# Altium PCB F103RCT6验证板_2022-02-19.pcbdoc (part 2 of 2)
Units mm, origin at the board's own origin, x right, y up, seen from the top; angles counter-clockwise.
Board outline 119 x 89.53 mm, 2 copper layers (Top Layer, Bottom Layer); 128 components, 123 nets, 496 pads, 479 vias.
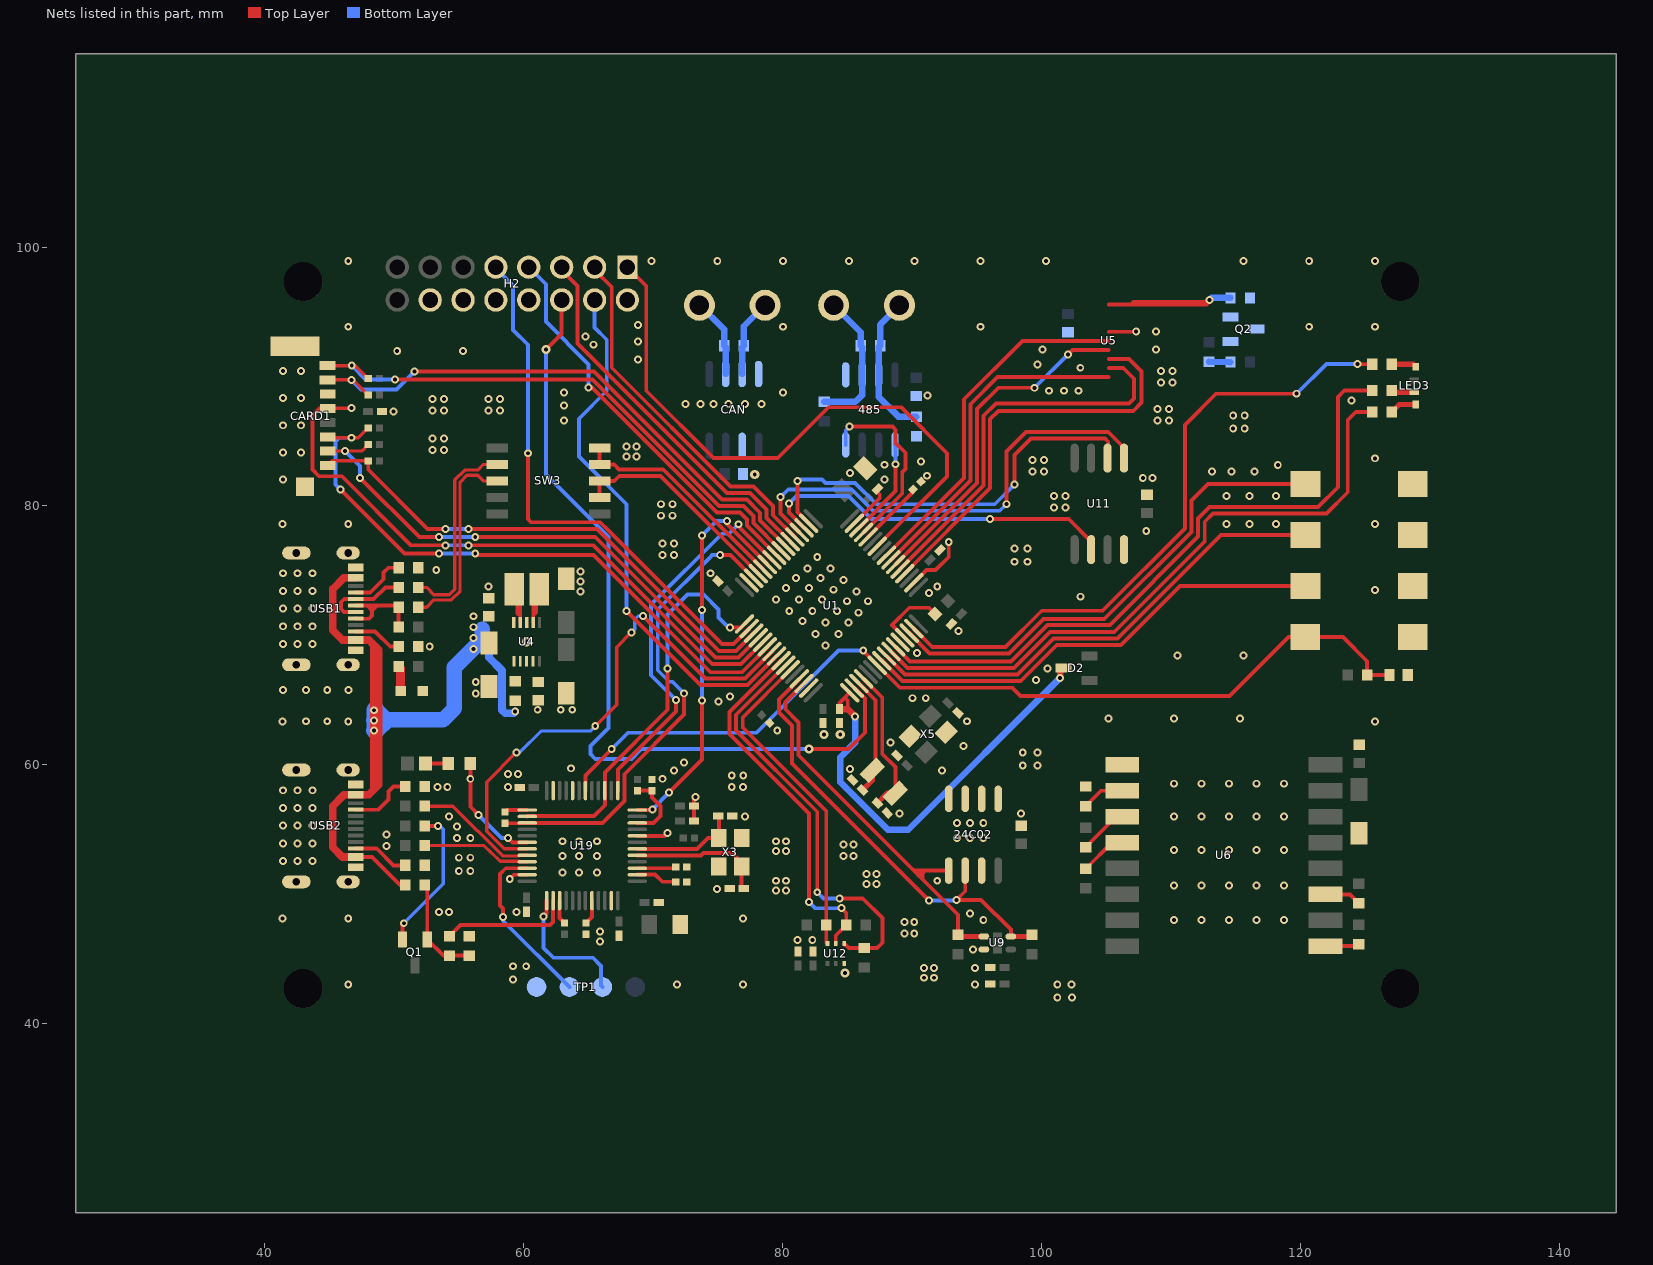
[diagram p2: the nets of this part, all layers, seen from the top]

## Via types
v1: diameter 0.61, hole 0.305, Top Layer to Bottom Layer, tented both sides, 454 vias
v2: diameter 0.7, hole 0.305, Top Layer to Bottom Layer, tented both sides, 25 vias

## Nets (pads, with @x,y where several pads share a name; then routed paths per layer and width w, separated by ;. In a path a pad name is that pad's centre, name@x,y a point inside that pad or via, vN(x,y) a via of type N, cw(c..) or ccw(c..) an arc to the next point about the centre after c; other vN are vias at no path point) (continued)
GND: 24C02.1 24C02.2 24C02.3 24C02.4 24C02.7 485.5 C1.1 C2.2 C3.1 C4.2 C5.1 C6.2 C7.1 C8.1 C9.1 C10.1 C11.2 C12.1 C13.1 C14.2 C15.1 C16.1 C17.1 C18.1 C19.1 C20.1 C21.1 C22.1 C23.2 C24.2 C25.2 C27.1 C29.2 C31.1 C32.1 C33.1 C34.2 C35.1 C36.1 C37.1 C38.2 C39.1 C40.1 C45.2 CAN.2 CAN.8 CARD1.6 CARD1.9 CARD1.10 H2.2 H2.8 H2.10 H2.12 H2.14 KEY1.B KEY2.B KEY3.B LED4.2 Q2.2 R1.2 R6.2 R9.2 R12.2 R15.2 R24.2 R28.1 R29.2 R32.2 R33.2 R39.1 R44.2 R57.2 RST.B TP1.4 U1.12 U1.18 U1.31 U1.47 U1.63 U3.2 U4.3 U4.9 U4.11 U5.8 U5.13 U6.9 U9.4 U11.4 U12.3 U19.8 U19.20 U19.23 U19.35 U19.47 USB1.1 USB1.12 USB1.13 USB1.14 USB1.15 USB1.16 USB2.1 USB2.12 USB2.13 USB2.14 USB2.15 USB2.16 X3.2 X3.4 X5.2 X5.4 | length 16.5
  Top Layer w0.3: 59.182,51.435 v1(58.928,51.181) 59.264,51.517 U19.35@60.277,51.517 ; U19.8@68.777,54.517 70.9,54.517 v1(71.12,54.737) ; C27.1@73.158,55.677 73.158,56.82 73.158,57.41 v1(73.279,57.531) ; U1.31@85.547,78.664 87.503,80.62 87.503,80.899 87.323,81.079 C22.1@87.323,81.302 ; U1.18@90.143,74.068 91.132,75.057 91.821,75.057 92.837,76.073 v1(92.837,77.216) ; U5.8@105.191,93.457 v1(107.315,93.472)
  other v1: 101.219,42.037 102.362,42.037 46.452,43.043 71.852,43.043 76.932,43.043 94.869,43.053 101.219,43.053 102.332,43.043 59.182,43.434 90.932,43.561 91.694,43.561 90.932,44.323 91.694,44.323 94.869,44.323 59.182,44.45 60.198,44.45 94.701,45.757 65.913,46.355 81.153,46.482 82.296,46.482 89.408,46.99 90.17,46.99 65.913,47.117 89.408,47.879 90.17,47.879 95.504,48.006 110.236,48.006 112.363,48.006 114.49,48.006 116.618,48.006 118.745,48.006 41.372,48.123 46.452,48.123 76.932,48.123 94.488,48.514 53.467,48.641 54.229,48.641 59.436,48.641 79.502,50.292 80.264,50.292 74.93,50.419 110.236,50.673 112.363,50.673 114.49,50.673 116.618,50.673 118.745,50.673 86.487,50.8 87.249,50.8 79.502,51.054 80.264,51.054 91.948,51.054 86.487,51.562 87.249,51.562 62.992,51.689 64.262,51.689 65.659,51.689 54.991,51.816 55.88,51.816 41.402,52.578 42.545,52.578 43.688,52.578 54.991,52.832 55.88,52.832 62.992,52.959 64.262,52.959 65.659,52.959 84.709,52.959 85.471,52.959 79.502,53.34 80.264,53.34 110.236,53.423 112.363,53.423 114.49,53.423 116.618,53.423 118.745,53.423 49.403,53.721 84.709,53.848 85.471,53.848 41.402,53.943 42.545,53.943 43.688,53.943 62.992,54.102 64.262,54.102 65.659,54.102 79.502,54.102 80.264,54.102 54.864,54.356 55.88,54.356 93.472,54.356 94.488,54.356 95.504,54.356 49.403,54.61 54.864,55.245 41.402,55.308 42.545,55.308 43.688,55.308 93.472,55.499 94.488,55.499 95.504,55.499 54.229,56.007 77.089,56.007 110.236,56.007 112.363,56.007 114.49,56.007 116.618,56.007 118.745,56.007 89.027,56.261 98.425,56.261 41.402,56.674 42.545,56.674 43.688,56.674 41.402,58.039 42.545,58.039 43.688,58.039 53.34,58.293 54.102,58.293 58.801,58.293 76.073,58.293 76.932,58.283 110.236,58.547 112.363,58.547 114.49,58.547 116.618,58.547 118.745,58.547 70.739,58.928 76.073,59.182 76.962,59.182 58.801,59.309 59.563,59.309 71.628,59.563 92.329,59.563 85.217,59.69 63.665,59.738 98.552,59.944 99.695,59.944 72.39,60.198 98.552,60.96 99.695,60.96 93.98,61.468 88.335,61.74 79.588,62.648 41.372,63.363 43.18,63.373 44.831,63.373 46.452,63.363 94.234,63.373 125.758,63.363 105.169,63.583 110.249,63.583 115.329,63.583 61.087,64.262 62.865,64.262 63.754,64.262 75.057,64.897 90.043,65.151 91.059,65.151 75.946,65.278 56.302,65.513 41.402,65.786 43.18,65.786 44.831,65.786 46.482,65.786 56.302,66.402 99.568,66.548 100.457,67.437 110.518,68.443 115.598,68.443 90.394,68.631 52.746,69.134 83.312,69.215 41.402,69.342 42.545,69.342 43.688,69.342 82.55,70.104 84.328,70.104 93.599,70.358 41.402,70.707 42.545,70.707 43.688,70.707 83.312,70.993 85.09,70.993 81.534,71.12 85.852,71.755 80.518,71.882 82.296,71.882 84.201,71.882 41.402,72.072 42.545,72.072 43.688,72.072 84.963,72.644 86.614,72.644 79.502,72.771 81.28,72.771 83.058,72.771 103.011,72.992 91.313,73.279 64.39,73.405 85.725,73.406 41.402,73.438 42.545,73.438 43.688,73.438 83.947,73.533 125.758,73.523 80.264,73.66 82.042,73.66 57.277,73.787 91.948,73.787 64.39,74.167 84.709,74.295 81.026,74.422 82.931,74.422 41.402,74.803 42.545,74.803 43.688,74.803 74.422,74.803 64.39,74.929 53.248,75.042 81.915,75.184 83.693,75.184 97.917,75.692 98.933,75.692 82.677,76.073 70.739,76.2 71.628,76.2 97.917,76.708 98.933,76.708 70.739,77.089 71.628,77.089 108.091,78.072 41.372,78.603 46.452,78.603 114.3,78.613 116.078,78.613 118.11,78.613 125.758,78.603 70.612,79.248 71.501,79.248 100.965,79.883 101.854,79.883 70.612,80.137 71.501,80.137 100.965,80.772 101.854,80.772 114.3,80.772 116.078,80.772 118.11,80.772 41.402,82.042 87.884,82.042 107.823,82.169 108.585,82.169 91.145,82.333 85.217,82.55 99.314,82.677 100.203,82.677 113.157,82.677 114.681,82.677 116.459,82.677 118.251,83.152 87.884,83.185 90.684,83.426 99.314,83.566 100.203,83.566 125.758,83.683 67.945,83.82 68.707,83.82 41.402,84.138 42.799,84.138 52.959,84.328 53.848,84.328 67.945,84.582 68.707,84.582 52.959,85.217 53.848,85.217 114.808,85.979 115.697,85.979 41.402,86.233 42.799,86.233 63.119,86.614 108.966,86.614 109.855,86.614 114.808,86.995 115.697,86.995 49.952,87.295 52.959,87.376 53.848,87.376 57.277,87.376 58.166,87.376 108.966,87.503 109.855,87.503 63.119,87.757 72.517,87.884 73.66,87.884 74.676,87.884 75.819,87.884 77.089,87.884 78.359,87.884 123.952,88.138 52.959,88.265 53.848,88.265 57.277,88.265 58.166,88.265 41.402,88.328 42.799,88.328 91.186,88.519 63.119,88.773 80.038,88.763 100.584,88.9 101.727,88.9 102.87,88.9 109.22,89.535 110.109,89.535 41.402,90.424 42.799,90.424 109.22,90.424 110.109,90.424 102.997,90.678 99.695,90.932 68.834,91.313 50.234,91.96 55.314,91.96 100.076,92.075 108.839,92.075 65.405,92.456 68.834,92.71 64.77,93.091 108.839,93.472 46.452,93.843 80.038,93.843 95.278,93.843 120.678,93.843 125.758,93.843 68.834,93.98 46.452,98.923 69.878,98.923 74.958,98.923 80.038,98.923 85.118,98.923 90.198,98.923 95.278,98.923 100.358,98.923 115.598,98.923 120.678,98.923 125.758,98.923
  other v2: 84.836,43.942 83.185,62.357 84.455,62.357 60.234,69.515 77.851,82.423
IICSCL: 24C02.6 R48.2 U1.61 U9.2 | length 34.6
  Top Layer w0.3: U1.61@81.304,66.644 79.715,65.055 79.715,64.046 80.731,63.03 80.731,60.111 v1(91.314,49.529) ; 24C02.6@94.108,51.837 94.108,50.244 v1(93.431,49.567) 95.336,49.567 97.63,47.273 U9.2@97.63,46.746
  Top Layer w0.4: U9.2@97.63,46.746 99.131,46.746 R48.2@99.258,46.872
  Bottom Layer w0.3: v1(91.314,49.529) 93.393,49.529 v1(93.431,49.567)
IICSDA: 24C02.5 R46.2 U1.62 U9.3 | length 31.8
  Top Layer w0.3: U1.62@81.658,66.29 80.223,64.855 80.223,64.299 81.239,63.283 81.239,60.743 93.558,48.424 R46.2@93.558,46.891 ; 89.936,52.046 90.145,51.837 24C02.5@92.838,51.837 ; 90.511,51.471 90.552,51.512 90.552,51.837 ; 90.797,51.184 90.797,51.611 91.023,51.837 91.118,51.837
  Top Layer w0.4: R46.2@93.558,46.891 93.704,46.746 U9.3@95.55,46.746
KEY1: KEY1.A U1.14 | length 38.1
  Top Layer w0.3: U1.14@89.789,70.179 91.364,68.605 97.483,68.605 100.15,71.272 104.849,71.272 111.58,78.003 111.58,80.416 112.85,81.686 KEY1.A@120.384,81.686
KEY2: KEY2.A U1.9 | length 37.4
  Top Layer w0.3: U1.9@88.021,68.411 89.454,66.98 98.143,66.98 100.924,69.761 105.877,69.761 113.866,77.749 KEY2.A@120.384,77.749
KEY3: KEY3.A U1.8 | length 36.4
  Top Layer w0.3: U1.8@87.668,68.058 89.253,66.472 98.397,66.472 101.178,69.253 106.131,69.253 110.703,73.812 KEY3.A@120.384,73.812
LCDCS: U1.24 U5.7 | length 27.6
  Top Layer w0.3: U1.24@88.021,76.189 94.003,82.172 94.003,88.24 98.519,92.756 U5.7@105.191,92.757
LCDDC: U1.20 U5.5 | length 32.2
  Top Layer w0.3: U1.20@89.436,74.775 96.035,81.374 96.035,86.716 96.67,87.351 107.084,87.351 107.719,87.986 107.719,90.399 106.761,91.357 U5.5@105.191,91.357
LCDRES: U1.22 U5.6 | length 26.7
  Top Layer w0.3: U1.22@88.729,75.482 95.019,81.773 95.019,87.478 96.67,89.129 v1(99.464,89.129) ; v1(102.051,91.712) 102.396,92.057 U5.6@105.191,92.057
  Bottom Layer w0.3: v1(99.464,89.129) 99.468,89.129 v1(102.051,91.712)
LCDSCL: U1.21 U5.4 | length 32.1
  Top Layer w0.3: U1.21@89.082,75.128 95.527,81.573 95.527,86.97 96.479,87.921 105.225,87.921 ; 103.591,87.921 106.766,87.921 107.147,88.302 107.147,89.826 106.316,90.657 U5.4@105.191,90.657
LCDSDA: U1.23 U5.3 | length 26.1
  Top Layer w0.3: U1.23@88.375,75.836 94.511,81.971 94.511,87.859 96.609,89.957 U5.3@105.191,89.957
LED1: R11.2 U1.15 | length 49.7
  Top Layer w0.3: U1.15@90.143,70.532 91.562,69.113 97.229,69.113 100.023,71.907 104.722,71.907 111.072,78.257 111.072,86.258 113.485,88.671 v1(119.708,88.671) ; v1(124.419,90.969) R11.2@125.555,90.95
  Bottom Layer w0.3: v1(119.708,88.671) 122.005,90.969 v1(124.419,90.969)
LED2: R8.2 U1.11 | length 50.9
  Top Layer w0.3: U1.11@88.73,69.118 89.85,67.996 97.635,67.996 100.457,70.818 105.283,70.818 112.1,77.635 112.1,79.032 112.989,79.921 121.371,79.921 122.895,81.445 122.895,88.43 123.383,88.918 R8.2@125.555,88.918
LED2_1: LED2.1 R23.2 | length 1.8
  Top Layer w0.3: R23.2@52.43,60.117 LED2.1@54.182,60.117
LED3: R2.2 U1.10 | length 50.1
  Top Layer w0.3: U1.10@88.375,68.765 89.652,67.488 97.889,67.488 100.67,70.269 105.623,70.269 112.608,77.254 112.608,78.778 113.243,79.413 122.006,79.413 123.657,81.064 123.657,86.652 124.272,87.267 R2.2@125.555,87.267
LED3_1: LED3.1 R11.1 | length 1.9
  Top Layer w0.4: R11.1@127.061,90.95 128.72,90.95 LED3.1@128.911,90.759
LED3_3: LED3.3 R8.1 | length 1.8
  Top Layer w0.4: R8.1@127.061,88.918 127.19,88.789 LED3.3@128.786,88.789
LED_STLINK: LED2.2 U19.30 | length 10.1
  Top Layer w0.254: v1(55.88,58.928) LED2.2@55.882,60.117
  Top Layer w0.305: LED2.2@55.882,60.117 v1(55.88,58.928) 55.88,56.769 v1(56.515,56.134) ; v1(58.801,54.356) 59.14,54.017 U19.30@60.277,54.017
  Bottom Layer w0.305: v1(56.515,56.134) 58.293,54.356 v1(58.801,54.356)
LEDK: R49.2 U5.11 | length 17.3
  Top Layer w0.3: U5.11@105.191,95.557 112.627,95.557 v1(112.973,95.903)
  Top Layer w0.5: 107.132,95.649 112.72,95.649 v1(112.973,95.903)
  Bottom Layer w0.3: v1(112.973,95.903) 113.138,96.068 R49.2@114.598,96.068
  Bottom Layer w0.5: v1(112.973,95.903) 113.138,96.068 R49.2@114.598,96.068
MCU_TX: U1.42 U19.13 | length 30.2
  Top Layer w0.3: U19.13@67.277,58.017 67.277,59.657 71.755,64.135 v1(71.755,65.024) ; v1(76.604,78.588) 76.604,78.414 U1.42@79.183,75.836
  Bottom Layer w0.3: v1(71.755,65.024) 69.85,66.929 69.85,72.39 75.311,77.851 75.867,77.851 v1(76.604,78.588)
MUC_RX: U1.43 U19.12 | length 31
  Top Layer w0.3: U19.12@68.777,56.517 69.947,56.517 v1(69.947,56.566) ; v1(71.238,57.857) 73.787,60.406 v1(73.787,64.975) ; v1(73.787,71.965) v1(73.787,77.724) ; v1(75.715,78.842) 75.715,78.596 U1.43@78.829,75.482
  Bottom Layer w0.3: v1(69.947,56.566) v1(71.238,57.857) ; v1(73.787,64.975) 73.787,65.405 v1(73.787,71.965) ; v1(73.787,77.724) 74.905,78.842 v1(75.715,78.842)
NRST: C3.2 R5.2 RST.A U1.7 U19.18 | length 72.5
  Top Layer w0.3: U19.18@64.777,58.017 64.777,59.189 v1(66.802,61.214) ; v1(86.233,68.834) 86.233,68.786 U1.7@87.314,67.704 89.055,65.964 97.734,65.964 98.384,65.316 114.513,65.316 119.065,69.868 RST.A@120.38,69.868 123.276,69.888 125.156,68.006 R5.2@125.156,66.947 C3.2@126.878,66.947
  Bottom Layer w0.3: v1(66.802,61.214) 68.072,62.484 75.184,62.484 77.978,62.484 84.328,68.834 v1(86.233,68.834)
PA8: H2.7 U1.41 | length 31.4
  Top Layer w0.3: v1(65.024,89.154) 65.278,89.154 74.93,79.502 76.705,79.502 77.239,78.969 77.239,78.489 U1.41@79.536,76.189
  Bottom Layer w0.3: H2.7@60.399,98.45 61.722,97.127 61.722,94.234 65.024,90.932 v1(65.024,89.154)
PA11: SW3.4 SW3.5 U1.44 | length 17.2
  Top Layer w0.3: SW3.5@65.869,84.473 SW3.4@65.869,83.203 66.999,83.203 67.38,82.822 70.782,82.822 U1.44@78.476,75.128
PA12: SW3.2 SW3.3 U1.45 | length 16.8
  Top Layer w0.3: SW3.2@65.869,80.663 SW3.3@65.869,81.933 67,81.933 67.381,82.314 70.584,82.314 U1.45@78.122,74.775
PA15: H2.9 U1.50 | length 42.1
  Top Layer w0.3: v1(60.325,84.074) 60.325,78.994 60.579,78.74 65.913,78.74 66.548,78.105 66.675,77.978 75.311,69.342 76.225,69.342 U1.50@77.415,70.532
  Bottom Layer w0.3: H2.9@57.859,98.45 57.859,98.351 59.182,97.028 59.182,93.599 60.325,92.456 v1(60.325,84.074)
PB0: H2.1 U1.26 | length 48.1
  Top Layer w0.3: H2.1@68.019,98.45 69.469,96.999 69.469,88.9 74.676,83.693 79.629,83.693 83.566,87.63 89.154,87.63 92.71,84.074 92.71,82.292 U1.26@87.314,76.896
PB4: H2.4 U1.56 | length 41.7
  Top Layer w0.3: v1(67.945,71.882) 73.66,66.167 77.292,66.167 U1.56@79.536,68.411
  Bottom Layer w0.3: H2.4@65.479,95.91 65.479,93.779 66.421,92.837 66.421,88.9 64.262,86.741 64.262,83.82 67.945,80.137 v1(67.945,71.882)
PB5: R38.1 U1.57 U12.5 | length 28.8
  Top Layer w0.3: U1.57@79.89,68.058 75.905,64.073 75.905,62.395 82.043,56.258 v1(82.043,49.402) ; U12.5@84.112,46.203 84.112,46.84 R38.1@84.915,47.643 84.915,48.558 v1(84.541,48.932)
  Bottom Layer w0.3: v1(82.043,49.402) 82.513,48.932 v1(84.541,48.932)
PB6: R27.2 U1.58 U12.4 | length 32.7
  Top Layer w0.3: U1.58@80.244,67.704 76.413,63.874 76.413,62.649 82.678,56.385 v1(82.678,50.164) ; v1(84.414,49.694) 86.192,49.695 87.716,48.171 87.716,46.266 87.307,45.857 R27.2@86.303,45.856 ; U12.4@84.794,46.18 85.118,45.856 R27.2@86.303,45.856
  Bottom Layer w0.3: v1(82.678,50.164) 83.148,49.694 v1(84.414,49.694)
PB7: R26.1 U1.59 U12.6 | length 25.4
  Top Layer w0.3: U1.59@80.597,67.351 76.921,63.675 76.921,62.903 83.373,56.449 R26.1@83.373,47.643 83.373,46.291 U12.6@83.462,46.203
PC6: H2.3 U1.37 | length 28.3
  Top Layer w0.3: H2.3@65.479,98.45 65.479,98.224 66.802,96.901 66.802,90.678 75.969,81.509 77.747,81.509 79.271,79.985 79.271,79.284 U1.37@80.95,77.602
PC7: H2.5 U1.38 | length 29.6
  Top Layer w0.3: H2.5@62.939,98.45 62.939,98.224 64.158,97.005 64.158,92.558 75.715,81.001 77.493,81.001 78.763,79.731 78.763,79.083 U1.38@80.597,77.25
PC8: CARD1.7 R19.2 U1.39 | length 44
  Top Layer w0.254: CARD1.7@44.852,89.739 46.67,89.739 46.821,89.739 R19.2@47.995,88.565
  Top Layer w0.3: v1(51.585,90.399) 65.428,90.399 75.334,80.493 77.239,80.493 78.255,79.477 78.255,78.885 U1.39@80.244,76.896
  Bottom Layer w0.3: v1(46.706,89.739) 47.443,89.002 50.188,89.002 v1(51.585,90.399)
PC9: CARD1.8 R35.2 U1.40 | length 43
  Top Layer w0.254: CARD1.8@44.852,90.839 46.198,90.839 v1(46.724,90.839) 46.991,90.839 R35.2@47.995,89.835
  Top Layer w0.3: v1(50.061,89.764) 65.308,89.764 75.087,79.985 76.985,79.985 77.747,79.223 77.747,78.687 U1.40@79.89,76.543
  Bottom Layer w0.3: v1(46.724,90.839) 47.799,89.764 v1(50.061,89.764)
PC10: CARD1.1 R4.1 U1.51 | length 40.2
  Top Layer w0.254: CARD1.1@44.852,83.139 45.198,83.485 46.725,83.485 R4.1@47.995,83.485
  Top Layer w0.3: R4.1@47.995,83.485 47.995,82.813 52.576,78.232 v1(53.975,78.232) ; v1(55.753,78.232) 59.69,78.232 ; 59.563,78.232 59.69,78.232 ; U1.51@77.77,70.178 76.398,68.809 75.08,68.809 65.656,78.232 59.69,78.232
  Bottom Layer w0.3: v1(53.975,78.232) v1(55.753,78.232)
PC11: CARD1.2 R17.1 U1.52 | length 43
  Top Layer w0.254: CARD1.2@44.852,84.239 v1(46.217,84.239) 47.479,84.239 R17.1@47.995,84.755
  Top Layer w0.3: v1(47.372,82.168) 51.943,77.597 v1(53.467,77.597) ; v1(56.261,77.597) 65.529,77.597 74.826,68.301 76.599,68.301 U1.52@78.122,69.825
  Bottom Layer w0.3: v1(46.217,84.239) 47.372,83.084 v1(47.372,82.168) ; v1(53.467,77.597) v1(56.261,77.597)
PC12: CARD1.5 U1.53 | length 49.1
  Top Layer w0.254: CARD1.5@44.852,87.539 44.867,87.554 v1(46.706,87.554)
  Top Layer w0.3: CARD1.5@44.852,87.539 44.233,87.539 43.688,86.994 43.688,82.803 44.196,82.295 45.974,82.295 51.308,76.962 v1(53.975,76.962) ; v1(55.753,76.962) 65.402,76.962 74.572,67.793 76.797,67.793 U1.53@78.476,69.472
  Bottom Layer w0.3: v1(53.975,76.962) v1(55.753,76.962)
PC13: H2.6 U1.2 | length 64.2
  Top Layer w0.3: v2(61.722,92.075) 62.939,93.292 H2.6@62.939,95.91 ; v2(82.042,61.214) 83.312,61.214 85.09,61.214 86.36,62.484 86.36,65.123 U1.2@85.547,65.936
  Bottom Layer w0.3: v2(61.722,92.075) 61.722,82.423 66.548,77.597 66.548,62.865 65.151,61.468 65.151,60.833 65.532,60.452 68.326,60.452 69.088,61.214 v2(82.042,61.214)
PD2: CARD1.3 R36.1 U1.54 | length 48.4
  Top Layer w0.254: CARD1.3@44.852,85.339 44.922,85.268 v1(46.706,85.268) 47.238,85.268 R36.1@47.995,86.025
  Top Layer w0.3: v1(45.847,81.28) 50.8,76.327 v1(53.467,76.327) ; v1(56.261,76.327) 56.261,76.2 65.402,76.2 74.445,67.158 76.868,67.158 U1.54@78.829,69.118
  Bottom Layer w0.3: v1(45.847,81.28) 45.466,81.661 45.466,84.963 45.771,85.268 v1(46.706,85.268) ; v1(53.467,76.327) v1(56.261,76.327)
Q1_1: Q1.1 R34.1 R39.2 R40.1 | length 8
  Top Layer w0.3: R34.1@52.356,50.719 52.553,50.522 Q1.1@52.553,46.512 53.798,45.266 R40.1@54.27,45.266 R39.2@55.794,45.266
Q1_2: Q1.2 R14.1 | length 11.3
  Top Layer w0.3: Q1.2@50.653,46.512 50.653,47.679 v1(50.743,47.77) ; R14.1@52.356,55.291 v1(53.381,55.291)
  Bottom Layer w0.3: v1(50.743,47.77) 53.791,50.818 53.791,55.009 53.509,55.291 v1(53.381,55.291)
Q2_3: Q2.3 R49.1
R1_1: R1.1 U1.28 | length 5.1
  Top Layer w0.3: U1.28@86.607,77.603 90.077,81.073 R1.1@90.077,81.265
R2_1: LED3.4 R2.1 | length 2.1
  Top Layer w0.4: R2.1@127.061,87.267 127.633,87.839 LED3.4@128.911,87.839
R3_1: LED4.1 R3.1 | length 2
  Top Layer w0.7: R3.1@50.341,67.61 50.498,67.453 LED4.1@50.498,65.705
R7_2: R7.2 U19.39 | length 1.9
  Top Layer w0.3: U19.39@62.777,49.517 62.777,48.167 R7.2@63.16,47.785
R18_2: R18.2 R24.1 U19.10 | length 5.4
  Top Layer w0.3: U19.10@68.777,55.517 70.04,55.517 70.509,55.985 70.581,56.058 70.581,56.82 69.924,57.478 R24.1@69.924,58.012 R18.2@68.781,58.012
R28_2: R28.2 U19.44 | length 1.9
  Top Layer w0.3: R28.2@64.811,47.785 65.277,48.251 U19.44@65.277,49.517
R30_1: 485.7 R30.1 R44.1 U2.1 | length 11.3
  Bottom Layer w0.5: U2.1@89.027,95.504 87.535,94.012 R30.1@87.535,92.375 87.417,92.256 485.7@87.417,90.127 87.417,88.438 88.949,86.905 R44.1@90.338,86.905
R30_2: 485.6 R30.2 R37.1 U2.2 | length 11
  Bottom Layer w0.5: R37.1@83.226,88.048 85.63,88.048 86.147,88.565 485.6@86.147,90.127 86.147,92.256 R30.2@86.028,92.375 86.028,93.423 U2.2@83.947,95.504
R47_1: Q2.1 R47.1 R50.2 | length 1.7
  Bottom Layer w0.5: R47.1@112.938,91.124 R50.2@114.598,91.115
RTCVBAT: C34.1 D2.3 U1.1 | length 33.8
  Top Layer w0.3: C34.1@84.398,64.317 84.398,64.787 U1.1@85.193,65.583 ; 84.812,65.202 85.035,64.979 85.035,64.317
  Top Layer w0.5: C34.1@84.398,64.317 85.035,64.317 v1(85.598,63.754) ; v1(101.432,66.712) 101.432,67.204 D2.3@101.702,67.474
  Bottom Layer w0.5: v1(85.598,63.754) 85.598,61.722 84.455,60.579 84.455,58.674 88.138,54.991 89.711,54.991 v1(101.432,66.712)
RX: 485.1 U1.30 | length 7.6
  Top Layer w0.3: U1.30@85.9,78.311 88.732,81.142 v1(88.732,83.222)
  Bottom Layer w0.3: 485.1@88.687,84.717 88.732,84.671 v1(88.732,83.222)
S$67: 
S$69: 
S$1126: 
S$2862: 
S$2864: 
S$2868: 
S$2870: 
S$3594: 
S$3601: 
S$101909: 
S$101912: 
S$101932: 
S$101934: 
S$101983: 
S$102762: 
SPIMISO: U1.35 U11.2 | length 28
  Top Layer w0.3: v1(80.488,80.188) 80.488,79.481 U1.35@81.658,78.311 ; v1(96.012,78.994) 102.108,78.994 103.833,77.269 U11.2@103.833,76.632
  Bottom Layer w0.3: v1(80.488,80.188) 81.072,80.772 85.09,80.772 86.868,78.994 v1(96.012,78.994)
SPIMOSI: U1.36 U11.5 | length 37
  Top Layer w0.3: v1(79.853,80.696) 79.853,79.409 U1.36@81.304,77.957 ; v1(97.282,80.137) 97.282,84.201 98.806,85.72 105.156,85.72 106.373,84.501 U11.5@106.373,83.692
  Bottom Layer w0.3: v1(79.853,80.696) 80.437,81.28 85.344,81.28 86.995,79.629 96.774,79.629 v1(97.282,80.137)
SPISCK: U1.34 U11.6 | length 33.3
  Top Layer w0.3: v1(81.153,81.915) 81.153,79.522 U1.34@82.011,78.664 ; v1(97.917,81.661) 97.917,83.947 99.187,85.217 104.902,85.217 105.156,84.963 105.156,83.745 U11.6@105.103,83.692
  Bottom Layer w0.3: v1(81.153,81.915) 81.28,82.042 83.058,82.042 83.312,81.788 85.25,81.788 85.598,81.788 87.249,80.137 96.139,80.137 96.393,80.137 v1(97.917,81.661)
ST_SWCLK: TP1.2 U19.37 | length 10.4
  Top Layer w0.3: v1(61.538,48.278) 61.777,48.517 U19.37@61.777,49.517
  Bottom Layer w0.3: v1(61.538,48.278) 61.538,45.865 62.3,45.103 65.348,45.103 65.983,44.468 65.983,42.942 TP1.2@66.081,42.845
ST_SWDIO: TP1.3 U19.34 | length 13.3
  Top Layer w0.3: v1@58.42,48.158 58.42,48.895 58.166,49.149 58.166,51.562 58.621,52.017 U19.34@60.277,52.017
  Bottom Layer w0.3: v1(58.42,48.26) 58.42,47.965 TP1.3@63.541,42.845
STLUSBD+: R21.2 U19.33 | length 8.4
  Top Layer w0.254: R21.2@52.356,53.767 55.269,53.767 56.937,53.767 58.2,52.564 59.615,52.564 59.662,52.517 U19.33@60.277,52.517
STLUSBD-: R20.2 U19.32 | length 9.5
  Top Layer w0.254: R20.2@52.356,56.815 54.524,56.815 58.369,52.97 59.615,52.97 59.662,53.017 U19.32@60.277,53.017
T_JTCK_SWCLK: U1.49 U19.15 U19.26 | length 31.2
  Top Layer w0.3: U19.26@60.277,56.017 60.313,56.053 65.446,56.053 66.277,56.884 U19.15@66.277,58.017 66.277,59.419 71.12,64.262 v1(71.12,67.437) ; v1(75.946,70.612) 76.788,70.612 U1.49@77.061,70.886
  Bottom Layer w0.3: v1(71.12,67.437) 71.12,71.628 72.644,73.152 73.914,73.152 75.057,72.009 75.057,71.374 75.819,70.612 v1(75.946,70.612)
T_JTMS_SWDIO: R10.2 U1.46 U19.27 | length 37.5
  Top Layer w0.3: R10.2@58.558,55.493 U19.27@60.277,55.517 66.103,55.517 67.788,57.201 67.788,59.279 72.39,63.881 v1(72.39,65.532) ; v1(75.184,76.2) 75.99,76.2 U1.46@77.769,74.421
  Bottom Layer w0.3: v1(72.39,65.532) 71.501,66.421 71.247,66.421 70.358,67.31 70.358,72.009 74.422,76.073 74.549,76.2 v1(75.184,76.2)
T_SWDIO_IN: R10.1 U19.25 | length 1.8
  Top Layer w0.3: R10.1@58.558,56.359 58.716,56.517 U19.25@60.277,56.517
T_SWO: U1.55 U19.31 | length 40.8
  Top Layer w0.254: v1(59.436,60.96) 57.15,58.674 57.15,54.864 58.496,53.518 U19.31@60.277,53.517 ; v1(65.532,62.992) 67.183,64.643 67.183,69.088 v1(68.326,70.231)
  Top Layer w0.3: v1(69.215,71.501) 74.041,66.675 77.093,66.675 U1.55@79.183,68.765
  Bottom Layer w0.254: v1(59.436,60.96) 59.69,60.96 61.341,62.611 65.151,62.611 v1(65.532,62.992) ; v1(68.326,70.231) 68.58,70.485 68.58,71.247 68.834,71.501 v1(69.215,71.501)
TX: 485.4 U1.29 | length 14.8
  Top Layer w0.3: v1(85.176,86.143) 88.478,86.143 88.732,85.889 88.732,84.873 89.494,84.111 89.494,82.841 89.24,82.587 89.24,80.943 U1.29@86.254,77.957
  Bottom Layer w0.3: 485.4@84.877,84.717 84.877,85.844 v1(85.176,86.143)
U1_13: L1.2 U1.13 | length 5.5
  Top Layer w0.3: U1.13@89.436,69.825 88.458,70.805 89.789,72.136 91.308,72.136 L1.2@91.78,71.665
U4_2: L3.2 U4.2 | length 4.7
  Top Layer w0.3: U4.2@60.739,71.015 60.739,73.11 L3.2@61.207,73.579
  Top Layer w0.5: 60.874,71.801 60.874,73.245 L3.2@61.207,73.579
U4_4: L3.1 U4.4 | length 7.5
  Top Layer w0.3: L3.1@59.739,73.11 59.739,71.015 L3.1@59.739,73.11 ; L3.1@59.739,73.11 L3.1@59.27,73.579 L3.1@59.739,73.11
  Top Layer w0.5: L3.1@59.27,73.579 59.604,73.245 59.604,71.761
U4_6: C36.2 R13.1 U4.6 U4.7 U4.8
U6_1: R54.2 U6.1 | length 2.6
  Top Layer w0.3: U6.1@121.935,46.005 124.35,46.005 R54.2@124.501,46.155
U6_3: R53.2 U6.3 | length 2.8
  Top Layer w0.3: U6.3@121.935,50.005 123.826,50.005 R53.2@124.501,49.33
U6_10: R57.1 U6.10 | length 3.3
  Top Layer w0.3: R57.1@103.419,56.823 104.6,58.005 U6.10@106.233,58.005
U6_11: R56.1 U6.11 | length 3.8
  Top Layer w0.3: R56.1@103.419,53.648 105.775,56.005 U6.11@106.233,56.005
U6_12: R55.1 U6.12 | length 3.7
  Top Layer w0.3: R55.1@103.419,51.98 105.443,54.005 U6.12@106.233,54.005
U7_6: CAN.6 R45.1 U10.2 | length 6.2
  Bottom Layer w0.5: U10.2@73.574,95.55 75.487,93.636 R45.1@75.487,92.375 75.606,92.256 CAN.6@75.606,90.194
U7_7: CAN.7 R45.2 U10.1 | length 6.1
  Bottom Layer w0.5: CAN.7@76.876,90.194 76.876,92.256 R45.2@76.994,92.375 76.994,93.89 U10.1@78.654,95.55
U19_2: R9.1 U19.2 | length 3.2
  Top Layer w0.3: U19.2@68.777,51.517 68.803,51.543 70.145,51.543 70.715,50.973 R9.1@71.744,50.973
U19_3: R29.1 U19.3 | length 3
  Top Layer w0.3: U19.3@68.777,52.017 71.645,52.017 R29.1@71.744,52.116
U19_5: C32.2 U19.5 X3.3 | length 10.5
  Top Layer w0.3: U19.5@68.777,53.017 73.701,53.017 73.878,53.194 76.114,53.194 76.832,52.475 X3.3@76.832,52.159 76.832,50.643 C32.2@77.01,50.465
U19_6: C37.2 U19.6 X3.1 | length 8.4
  Top Layer w0.3: U19.6@68.777,53.517 73.389,53.517 74.231,54.359 X3.1@75.082,54.359 75.082,56.002 C37.2@75.031,56.053
USB1_4: R15.1 USB1.4 | length 4.4
  Top Layer w0.3: USB1.4@47.045,73.304 48.153,73.304 49.19,74.341 49.19,74.849 49.571,75.23 R15.1@50.341,75.23
USB1_5: R22.1 USB1.5 USB1.7 | length 6.7
  Top Layer w0.3: USB1.7@47.045,71.805 46.138,71.805 45.888,72.055 45.888,72.563 46.142,72.817 47.045,72.805 48.415,72.805 49.317,73.706 R22.1@50.341,73.706
USB1_6: R16.1 R31.1 USB1.6 USB1.8 | length 8.5
  Top Layer w0.3: USB1.8@47.045,71.304 48.047,71.293 48.301,71.547 48.301,71.928 ; 48.61,72.304 48.61,72.237 48.301,71.928 ; R31.1@50.341,70.658 R16.1@50.341,72.182 50.219,72.304 47.045,72.304 47.924,72.304 48.301,71.928
USB1_10: R12.1 USB1.10 | length 3.8
  Top Layer w0.3: USB1.10@47.046,70.305 48.527,70.305 49.698,69.134 R12.1@50.341,69.134
USB2_4: R33.1 USB2.4 | length 4.9
  Top Layer w0.3: USB2.4@47.045,56.54 48.788,56.54 49.571,57.323 49.571,57.958 49.952,58.339 R33.1@50.849,58.339
USB2_10: R32.1 USB2.10 | length 4.3
  Top Layer w0.3: USB2.10@47.045,53.54 48.201,53.54 48.654,53.54 49.952,52.243 R32.1@50.849,52.243
USBD+: R16.2 SW3.8 | length 15.5
  Top Layer w0.254: R16.2@51.848,72.182 52.505,72.182 53.064,72.741 54.08,72.741 54.422,72.741 55.086,73.404 55.086,81.425 55.086,81.841 55.61,82.365 56.458,82.365 56.89,81.933 SW3.8@57.969,81.933
USBD-: R22.2 SW3.7 | length 15.5
  Top Layer w0.254: R22.2@51.848,73.706 52.505,73.706 53.064,73.147 54.08,73.147 54.254,73.147 54.68,73.573 54.68,81.425 54.68,82.009 55.442,82.771 56.458,82.771 56.89,83.203 SW3.7@57.969,83.203
USBRENUMN: R40.2 U19.38 | length 10.1
  Top Layer w0.3: R40.2@54.27,46.773 55.121,47.625 62.029,47.625 62.278,47.874 U19.38@62.277,49.517
VBUS: C11.1 C40.2 R13.2 R34.2 U4.5 USB1.2 USB1.11 USB2.2 USB2.11 | length 70.9
  Top Layer w0.3: USB2.11@47.044,52.892 48.288,52.892 50.461,50.719 R34.2@50.849,50.719
  Top Layer w0.6: USB2.11@47.045,52.891 46.002,52.891 45.253,53.64 45.253,56.561 45.253,56.815 46.129,57.691 47.045,57.691 48.034,57.691 ; USB1.11@47.045,69.655 46.002,69.655 45.253,70.404 45.253,73.579 46.129,74.455 USB1.2@47.045,74.455 ; USB1.11@47.046,69.654 48.034,69.654 48.428,69.261 ; 48.428,58.466 v1(48.428,62.66) v1(48.428,63.443) v1(48.428,64.222) 48.428,69.261 ; 48.428,58.951 48.428,58.085 48.034,57.691 ; 48.034,57.691 48.809,58.466 48.809,66.213 48.809,66.721 48.809,68.88 48.428,69.261
  Bottom Layer w0.6: 57.318,69.45 57.318,68.307 58.334,67.291 58.334,64.243 58.588,63.989 59.223,63.989 v1(59.35,64.116)
  Bottom Layer w1.2: v1(48.428,62.66) 48.687,62.66 49.508,63.481 ; v1(48.428,63.443) 48.465,63.481 53.762,63.481 54.651,64.37 54.651,67.545 56.81,69.704 56.81,70.466 ; v1@48.555,64.243 48.644,64.243 49.406,63.481
  Bottom Layer w1.4: v1@48.555,62.681 v1@48.555,64.243
  other v1: 56.134,68.942 56.134,69.788 56.134,70.635 56.134,71.482
X1_1: C23.1 U1.4 X1.1 | length 11.6
  Top Layer w0.3: U1.4@86.254,66.643 87.7,65.197 87.7,60.851 88.711,59.84 X1.1@88.711,57.808
  Top Layer w0.4: C23.1@87.315,57.045 88.077,57.808 X1.1@88.711,57.808
X1_2: C6.1 U1.3 X1.2 | length 9.2
  Top Layer w0.3: U1.3@85.9,66.29 87.192,64.998 87.192,59.825 X1.2@86.943,59.576
  Top Layer w0.4: C6.1@86.18,58.052 86.943,58.815 X1.2@86.943,59.576
pads on no net: CAN.5 U5.1 U5.2 U5.9 U6.2 U6.4 U6.5 U6.6 U6.7 U6.13 U6.14 U9.5 U12.2 U19.4 U19.11 U19.14 U19.16 U19.17 U19.19 U19.21 U19.22 U19.28 U19.29 U19.40 U19.41 U19.42 U19.43 U19.45 U19.46 USB1.3 USB1.9 USB2.3 USB2.9

## Polygon pours and split planes (outlines as drawn)
GND on Top Layer (solid): 39.243,101.346 38.862,100.965 38.862,38.354 39.243,38.735 104.013,38.735 104.013,44.958 124.841,44.958 124.841,38.735 131.572,38.735 131.699,38.862 131.699,101.092
GND on Bottom Layer (solid): 38.481,101.727 38.1,101.346 38.1,38.1 38.735,38.735 104.013,38.735 104.013,44.958 124.841,44.958 124.841,38.735 131.699,38.735 131.318,39.116 131.318,102.235

## Keep-outs
Keep-Out Layer:
  lines w0.254: 40.3,42.495 ccw(c42.8,42.495) 42.8,39.995 ; 40.3,97.495 cw(c42.8,97.495) 42.8,99.995 ; 127.8,39.995 ccw(c127.8,42.495) 130.3,42.495 ; 127.8,99.995 cw(c127.8,97.495) 130.3,97.495

## Other copper
Top Layer:
  region net 3V3: 85.372,79.32 85.177,79.125 85.372,79.325 85.372,79.32
  region net 3V3: 85.372,79.325 85.372,80.531 86.553,80.531 85.372,79.325
  region net VBUS: 47.412,69.642 47.806,69.248 48.682,69.261
  region net VBUS: 47.793,69.261 48.174,68.88 48.428,68.88 48.428,69.261 48.034,69.654
  region net VBUS: 47.92,57.949 47.92,58.212 48.174,58.466 48.428,58.466 47.92,57.949 47.666,57.831 47.666,57.958 47.92,58.212
  region net VBUS: 47.92,57.945 47.666,57.691 47.92,57.949 47.92,57.945
  region net U4_4: 59.477,73.372 59.477,72.817 59.27,73.023 59.27,73.579 59.477,73.372
  region net U4_2: 61.207,72.777 61.001,72.571 61.001,73.372 61.207,73.579 61.207,72.777
  region net U4_2: 61.005,71.61 60.743,71.348 60.743,72.245 61.005,72.507 61.005,71.61
  region net U4_4: 59.477,72.571 59.27,72.777 59.27,73.579 59.477,73.372 59.477,72.571
  region net U4_4: 59.735,71.285 59.473,71.547 59.473,72.063 59.735,71.801 59.735,71.285
  region net 3V3: 69.346,50.448 69.346,49.384 68.875,49.384 68.875,50.919 69.346,50.448
  region net 3V3: 103.956,94.633 103.194,94.633 103.194,94.857 103.194,95.395 103.448,95.141 103.575,95.141 104.337,95.014 104.464,94.76 103.956,94.633
  region net LEDK: 105.191,95.557 106.912,95.557 107.131,95.776 107.258,95.903 107.131,95.903
  region net 3V3: 105.191,94.857 106.78,94.857 107.131,94.506 107.004,94.506
  region net 3V3: 77.062,73.714 76.246,72.898 75.819,72.898 75.311,73.406 75.692,73.787 75.692,73.914 75.946,74.168 76.2,74.168 76.454,74.422
  region net 3V3: 82.365,65.583 82.677,65.271 82.677,63.881 83.439,63.881 83.439,64.77
  region net RTCVBAT: 85.193,65.583 84.836,65.225 84.836,63.881 84.074,63.881 84.074,64.77
  region net 3V3: 82.365,65.583 82.296,65.513 81.915,65.278 82.55,64.77 82.931,64.77
  region net RTCVBAT: 85.193,65.583 85.217,65.559 85.471,65.151 84.637,64.317 84.398,64.317
  rectangle net VBUS: 56.81,70.658 59.35,71.42
  rectangle net VBUS: 56.81,70.658 58.08,71.928
  rectangle net 3V3: 61.128,70.531 64.049,71.42
  rectangle net 3V3: 62.525,67.437 64.77,71.882
  rectangle net VBUS: 55.794,68.307 58.08,71.99
  rectangle net 3V3: 61.128,67.545 64.049,68.434
  rectangle net U4_6: 58.842,66.021 61.636,66.91
  rectangle net U4_6: 59.096,66.021 60.366,68.434
  rectangle net VBUS: 58.969,63.735 59.731,65.386
  rectangle net 3V3: 69.002,46.844 69.764,49.638
  rectangle net 3V3: 69.002,46.844 70.399,48.495
  rectangle net 3V3: 68.494,49.003 69.383,51.162
  rectangle net 3V3: 67.224,49.003 69.764,49.765
  rectangle net 3V3: 67.097,47.479 67.732,49.384
  rectangle net 3V3: 67.097,47.479 69.637,49.638
  rectangle net 3V3: 59.985,49.384 60.493,51.162
  rectangle net 3V3: 60.366,57.766 61.89,58.655
  rectangle net 3V3: 120.593,59.327 125.165,60.597
  rectangle net 3V3: 123.895,57.231 125.165,60.66
  rectangle net 3V3: 124.022,50.437 125.546,51.961
  rectangle net 3V3: 101.473,82.55 104.087,84.734
  rectangle net 3V3: 96.669,42.709 97.558,44.741
  rectangle net 3V3: 80.937,44.158 83.668,44.856
Bottom Layer:
  rectangle net VBUS: 55.794,68.307 58.08,71.99
  rectangle net Q2_3: 115.64,93.236 117.799,96.538
  rectangle net R47_1: 113.989,90.569 115.132,93.109
  rectangle net 3V3: 62.611,67.564 64.77,71.882

## Silkscreen, mask and mechanical layers (free items; w line width, h text height)
Top Overlay:
  lines w0.254 net S$101909: 49.022,91.44 49.022,93.853 49.276,93.853 63.754,93.853 68.834,93.853 69.469,93.853 69.469,91.44 68.707,91.44 49.022,91.44
  lines w0.254 net S$101912: 51.483,91.44 51.483,93.853 ; 54.165,91.44 54.165,93.853 ; 56.68,91.44 56.68,93.853 ; 59.334,91.44 59.334,93.853 ; 61.85,91.44 61.85,93.853 ; 64.361,91.44 64.361,93.853 ; 66.892,91.44 66.892,93.853
  lines w0.254 net S$101932: 49.022,92.619 51.483,92.606
  lines w0.254 net S$101934: 51.483,92.613 51.513,92.583 69.469,92.529
  lines w0.254 net S$101983: 63.754,62.357 74.803,62.357 75.946,63.5 77.47,65.024 80.772,65.024
  lines w0.254 net S$2862: 93.349,99.469 121.349,99.469
  lines w0.254 net S$2864: 121.349,85.969 121.349,90.297 121.349,99.469
  lines w0.254 net S$2868: 93.349,85.969 93.349,99.469
  lines w0.254 net S$2870: 93.349,85.969 121.349,85.969
  lines w0.254 net S$3594: 93.317,98.928 106.617,98.928
  lines w0.254 net S$3601: 93.349,86.505 106.649,86.505
  text "SD_CARD" at 40.894,93.853 h1.14
  text "A15" at 57.15,92.85 h1.14
  text "3V3" at 49.53,92.837 h1.14
  text "3V3" at 52.07,92.837 h1.14
  text "3V3" at 54.737,92.837 h1.14
  text "A8" at 60.071,92.837 h1.14 r359
  text "C7" at 62.484,92.837 h1.14 r359
  text "B0" at 67.818,92.837 h1.14 r359
  text "C6" at 65.054,92.71 h1.14
  text "3V3" at 49.53,91.567 h1.14
  text "GND" at 51.816,91.567 h1.14 r1
  text "GND" at 54.483,91.567 h1.14 r1
  text "GND" at 57.023,91.567 h1.14 r1
  text "GND" at 59.69,91.567 h1.14 r1
  text "B4" at 65.138,91.554 h1.14
  text "C13" at 62.23,91.44 h1.14
  text "GND" at 67.183,91.44 h1.14 r1
  text "L" at 73.533,90.233 h1.14 r180
  text "H" at 78.232,90.233 h1.14 r180
  text "A" at 83.82,90.233 h1.14 r180
  text "B" at 89.027,90.233 h1.14 r180
  text "CAN" at 55.133,83.947 h1.14
  text "USB" at 54.95,82.677 h1.14 r1
  text "USB" at 54.95,81.407 h1.14 r1
  text "CAN" at 55.133,80.137 h1.14
  text "BOOT0" at 53.611,78.74 h1.14
  text "USB" at 41.656,77.47 h1.14 r1
  text "W25Q8_SPI FLASH" at 100.203,73.533 h1.14
  text "STM32F103RCT6" at 63.881,62.611 h1.14
  text "ESP-07" at 113.538,61.722 h1.14
  text "ST_LINK" at 41.275,60.833 h1.14
  text "SHTC3" at 96.52,47.879 h1.14
  text "LTR-390UV" at 81.661,42.418 h1.14
Bottom Overlay:
  lines w0.254: 83.982,75.057 90.348,75.057 ccw(c90.348,75.557) 90.848,75.557 90.848,79.129 ccw(c90.348,79.129) 90.348,79.629 83.982,79.629 ; 83.982,75.057 cw(c83.982,75.557) 83.482,75.557 83.482,79.129 cw(c83.982,79.129) 83.982,79.629 ; 89.51,51.977 78.302,51.977 cw(c78.302,52.977) 77.302,52.977 77.302,55.168 cw(c78.302,55.168) 78.302,56.168 89.51,56.168 ; 89.51,51.977 ccw(c89.51,52.977) 90.51,52.977 90.51,55.168 ccw(c89.51,55.168) 89.51,56.168 ; 102.338,64.936 107.317,64.936 ccw(c107.318,65.558) 107.94,65.558 107.939,70.537 ccw(c107.318,70.537) 107.318,71.159 102.338,71.159 ; 102.339,64.936 cw(c102.339,65.558) 101.717,65.558 101.716,70.537 cw(c102.339,70.537) 102.339,71.159 ; 51.964,83.118 51.964,89.926 cw(c52.751,89.926) 52.751,90.713 59.051,90.713 cw(c59.051,89.926) 59.838,89.926 59.838,83.118 cw(c59.051,83.118) 59.051,82.331 52.751,82.331 cw(c52.751,83.118) 51.964,83.118 ; 71.396,76.365 71.396,79.175 cw(c71.896,79.175) 71.896,79.675 80.431,79.675 cw(c80.431,79.175) 80.931,79.175 80.931,76.365 cw(c80.431,76.365) 80.431,75.865 71.896,75.865 cw(c71.896,76.365) 71.396,76.365 ; 101.067,73.153 101.067,78.953 cw(c102.067,78.953) 102.067,79.953 107.867,79.953 cw(c107.867,78.953) 108.867,78.953 108.867,73.153 cw(c107.867,73.153) 107.867,72.153 102.067,72.153 cw(c102.067,73.153) 101.067,73.153 ; 109.469,65.761 109.469,68.3 cw(c110.041,68.3) 110.041,68.872 114.612,68.872 cw(c114.612,68.3) 115.184,68.3 115.184,65.761 cw(c114.612,65.761) 114.612,65.189 110.041,65.189 cw(c110.041,65.761) 109.469,65.761 ; 109.596,69.988 109.596,72.807 cw(c110.155,72.807) 110.155,73.366 114.625,73.366 cw(c114.625,72.807) 115.184,72.807 115.184,69.988 cw(c114.625,69.988) 114.625,69.429 110.155,69.429 cw(c110.155,69.988) 109.596,69.988 ; 110.492,53.791 110.492,56.982 cw(c110.992,56.982) 110.992,57.482 117.866,57.482 cw(c117.866,56.982) 118.366,56.982 118.366,53.791 cw(c117.866,53.791) 117.866,53.291 110.992,53.291 cw(c110.992,53.791) 110.492,53.791
  lines w0.305 net S$102762: 84.755,51.977 84.755,56.168
  text "SD_D0→PC8" at 59.228,89.291 h1.14
  text "SD_D1→PC9" at 59.228,88.123 h1.14
  text "SD_D2→PC10" at 59.101,86.7 h1.14
  text "SD_D3→PC11" at 59.101,85.532 h1.14
  text "SD_CK→PC12" at 59.101,84.11 h1.14
  text "SD_CMD→PD2" at 59.101,82.941 h1.14
  text "LCD_DC  →PA4" at 108.417,78.445 h1.14
  text "CAN&USB" at 80.518,78.359 h1.14
  text "RS485" at 90.551,78.359 h1.14
  text "485_TX→PB11" at 90.467,77.513 h1.14
  text "LCD_SCL→PA5" at 108.417,77.424 h1.14
  text "CAN_TX&D+→PA12" at 80.495,77.252 h1.14
  text "485_RX→PB10" at 90.34,76.411 h1.14
  text "LCD_RES→PA6" at 108.417,76.251 h1.14
  text "CAN_RX&D-→PA11" at 80.495,76.19 h1.14
  text "485_RE→PB1" at 90.467,75.184 h1.14
  text "LCD_SDA→PA7" at 108.29,74.95 h1.14
  text "LCD_CS  →PC4" at 108.29,73.878 h1.14
  text "LCD_BLK→PC5" at 108.29,72.603 h1.14
  text "KEY1→PA0" at 114.854,71.918 h1.14
  text "KEY2→PC1" at 114.727,71.029 h1.14
  text "KEY3→PC0" at 114.854,70.013 h1.14
  text "W25Q80D" at 107.579,69.96 h1.14
  text "F_CS→PB12" at 107.696,68.707 h1.14 r359
  text "LED1→PA1" at 114.767,67.645 h1.14
  text "SCK→PB13" at 107.64,67.589 h1.14
  text "LED2→PC3" at 114.793,66.713 h1.14
  text "MISO→PC14" at 107.569,66.345 h1.14
  text "LED3→PC2" at 114.92,65.443 h1.14
  text "MOSI→PB15" at 107.696,65.354 h1.14
  text "ESP-07" at 118.004,56.128 h1.14
  text "MCU_TX→PA9" at 117.815,55.109 h1.14
  text "SHTC3&24C02" at 84.16,54.818 h1.14
  text "LTR-390UV" at 89.931,54.818 h1.14
  text "MCU_RX→PA10" at 117.942,53.929 h1.14
  text "SCL→PB8" at 84.287,53.548 h1.14
  text "SDA→PB7" at 89.875,53.485 h1.14
  text "SDA→PB9" at 84.16,52.278 h1.14
  text "SCL→PB6" at 89.748,52.278 h1.14
  text "DIO" at 64.262,44.45 h1.14
  text "CLK" at 67.056,44.45 h1.14 r359
  text "GND" at 61.808,44.323 h1.14 r359
  text "3V3" at 69.342,44.323 h1.14

## Text inside footprints (layer, text, board x,y; h text height)
SW3: Top Overlay "5" at 64.019,84.233 h0.8 r270; Top Overlay "4" at 64.091,83.162 h0.8 r235; Top Overlay "3" at 64.019,81.733 h0.8 r270; Top Overlay "2" at 64.019,80.433 h0.8 r270; Top Overlay "ON" at 60.669,78.633 h0.8 r90; Top Overlay "1" at 64.019,79.233 h0.8 r270